# EAGLE board Sch (EAGLE 9.6.0)
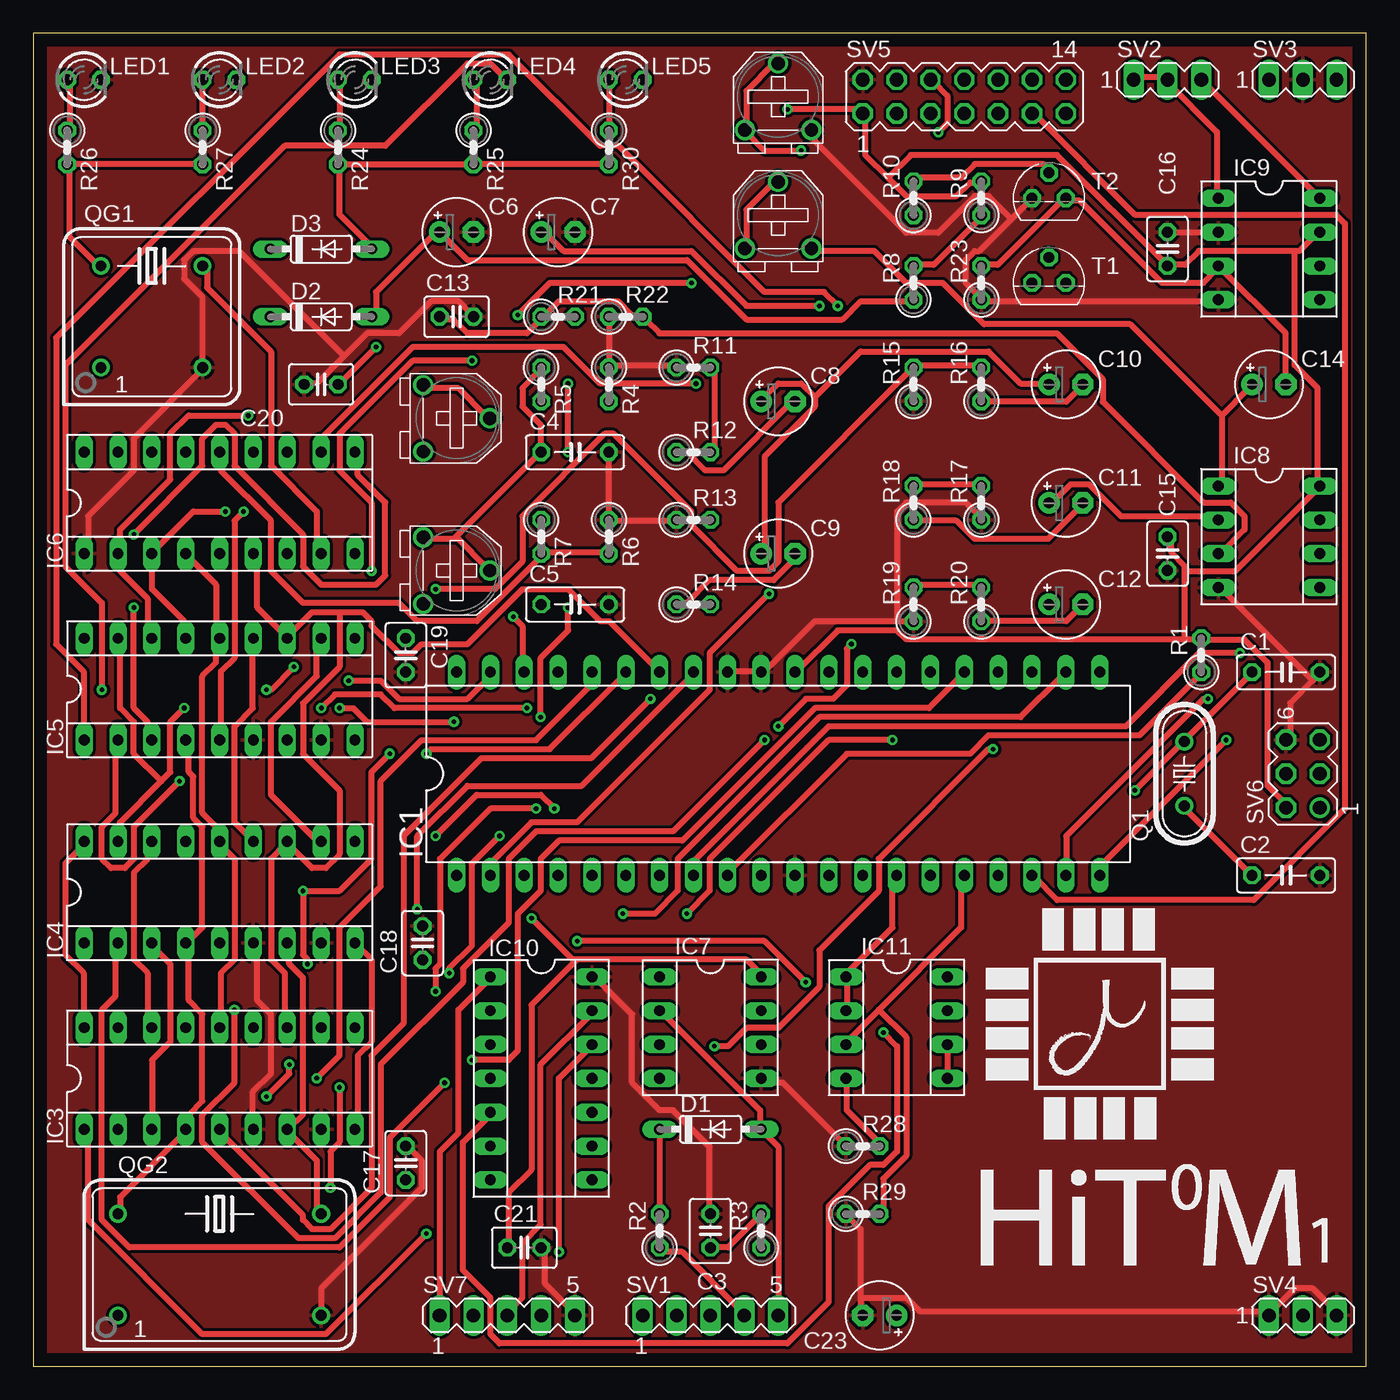
[diagram p0: board, top side]
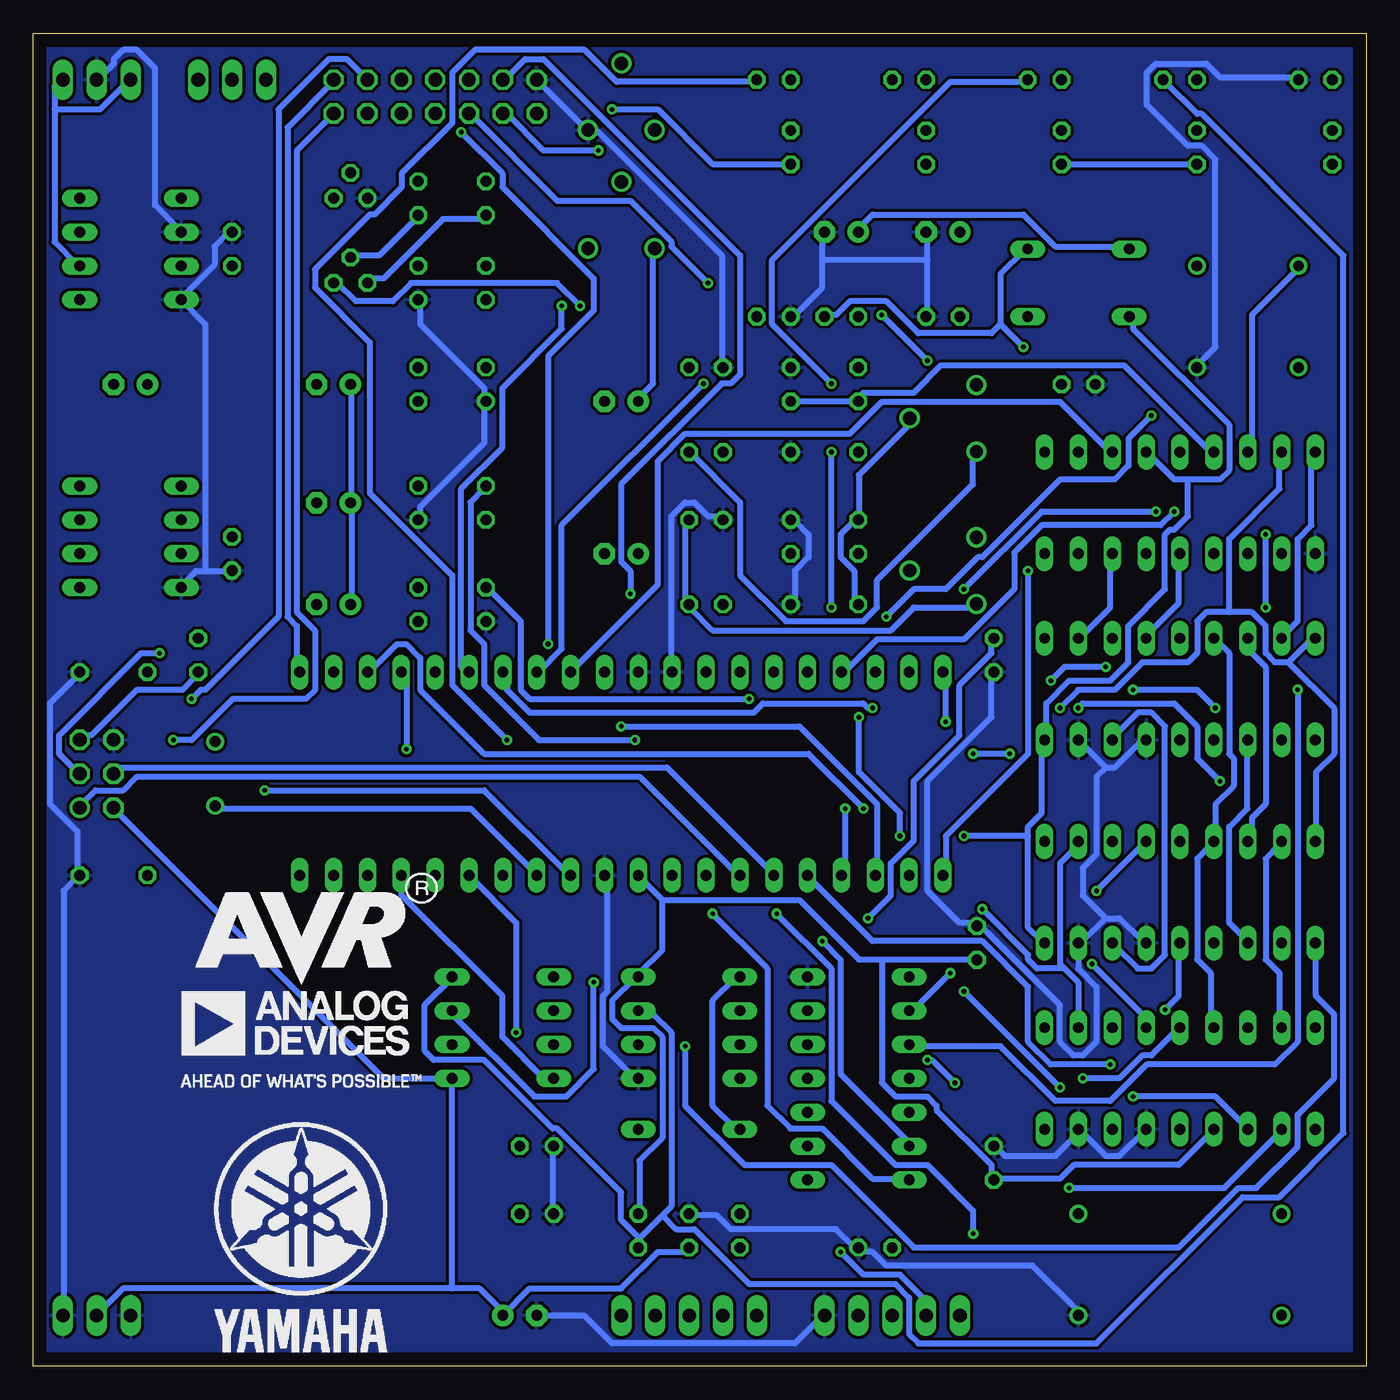
[diagram p1: board, bottom side, seen from below]

Size 100 x 100 mm. Coordinates in mm from the lower left corner, seen from the top.
Outline: 0,0 100,0 100,100 0,100 0,0
Copper layers (1*16): Top 0.035mm / dielectric 1.5mm / Bottom 0.035mm
Design rules "default": minimum track width 6mil, minimum drill 0.35mm, track to track 6mil, track to pad 6mil, pad to pad 6mil, via to via 6mil, smd to smd 6mil, copper to edge 40mil, drill to drill 6mil, minimum pad ring 10mil, minimum via ring 8mil, stop-mask expansion 4mil, vias tented up to drill 0mil, thermal gap 10mil
Net classes: 0 default: width 0.457 mm, clearance 0.229 mm

## Footprints (pad centres in the part's own frame; a part is rotated, then mirrored left to right if it is on the bottom)
C050-025X075 = drill 0.813 octagon: 1 -2.54,0; 2 2.54,0
C025-030X050 = drill 0.813 octagon: 1 -1.27,0; 2 1.27,0
E2,5-5 = drill 0.813 pad 1.6: + -1.27,0 | drill 0.813 pad 1.6 octagon: - 1.27,0
DO35-7 = drill 0.813 long: A 3.81,0; C -3.81,0
DIL40 = drill 0.813 long: 1 -24.13,-7.62; 2 -21.59,-7.62; 3 -19.05,-7.62; 4 -16.51,-7.62; 5 -13.97,-7.62; 6 -11.43,-7.62; 7 -8.89,-7.62; 8 -6.35,-7.62; 9 -3.81,-7.62; 10 -1.27,-7.62; 11 1.27,-7.62; 12 3.81,-7.62; 13 6.35,-7.62; 14 8.89,-7.62; 15 11.43,-7.62; 16 13.97,-7.62; 17 16.51,-7.62; 18 19.05,-7.62; 19 21.59,-7.62; 20 24.13,-7.62; 21 24.13,7.62; 22 21.59,7.62; 23 19.05,7.62; 24 16.51,7.62; 25 13.97,7.62; 26 11.43,7.62; 27 8.89,7.62; 28 6.35,7.62; 29 3.81,7.62; 30 1.27,7.62; 31 -1.27,7.62; 32 -3.81,7.62; 33 -6.35,7.62; 34 -8.89,7.62; 35 -11.43,7.62; 36 -13.97,7.62; 37 -16.51,7.62; 38 -19.05,7.62; 39 -21.59,7.62; 40 -24.13,7.62
SOCKET-18 = drill 0.813 long: 1 -10.16,-3.81; 2 -7.62,-3.81; 3 -5.08,-3.81; 4 -2.54,-3.81; 5 0,-3.81; 6 2.54,-3.81; 7 5.08,-3.81; 8 7.62,-3.81; 9 10.16,-3.81; 10 10.16,3.81; 11 7.62,3.81; 12 5.08,3.81; 13 2.54,3.81; 14 0,3.81; 15 -2.54,3.81; 16 -5.08,3.81; 17 -7.62,3.81; 18 -10.16,3.81
SOCKET-08 = drill 0.813 long: 1 -3.81,-3.81; 2 -1.27,-3.81; 3 1.27,-3.81; 4 3.81,-3.81; 5 3.81,3.81; 6 1.27,3.81; 7 -1.27,3.81; 8 -3.81,3.81
SOCKET-14 = drill 0.813 long: 1 -7.62,-3.81; 2 -5.08,-3.81; 3 -2.54,-3.81; 4 0,-3.81; 5 2.54,-3.81; 6 5.08,-3.81; 7 7.62,-3.81; 8 7.62,3.81; 9 5.08,3.81; 10 2.54,3.81; 11 0,3.81; 12 -2.54,3.81; 13 -5.08,3.81; 14 -7.62,3.81
LED3MM = drill 0.813 octagon: A -1.27,0; K 1.27,0
HC49/S = drill 0.813: 1 -2.413,0; 2 2.413,0
DIL08S = drill 0.813: 1 -3.81,-3.81; 4 3.81,-3.81; 5 3.81,3.81; 8 -3.81,3.81
DIL14S = drill 0.813: 1 -7.62,-3.81; 7 7.62,-3.81; 8 7.62,3.81; 14 -7.62,3.81
0207/2V = drill 0.813 octagon: 1 -1.27,0; 2 1.27,0
MA05-1 = drill 1.016 long: 1 -5.08,0; 2 -2.54,0; 3 0,0; 4 2.54,0; 5 5.08,0
MA03-1 = drill 1.016 long: 1 -2.54,0; 2 0,0; 3 2.54,0
MA07-2 = drill 1.016 octagon: 1 -7.62,-1.27; 2 -7.62,1.27; 3 -5.08,-1.27; 4 -5.08,1.27; 5 -2.54,-1.27; 6 -2.54,1.27; 7 0,-1.27; 8 0,1.27; 9 2.54,-1.27; 10 2.54,1.27; 11 5.08,-1.27; 12 5.08,1.27; 13 7.62,-1.27; 14 7.62,1.27
MA03-2 = drill 1.016: 1 -2.54,-1.27 | drill 1.016 octagon: 2 -2.54,1.27; 3 0,-1.27; 4 0,1.27; 5 2.54,-1.27; 6 2.54,1.27
TO92 = drill 0.813 octagon: 1 1.27,0; 2 0,1.905; 3 -1.27,0
TSR-065 = drill 1: 1 -2.5,-2.5; 2 0,2.5; 3 2.5,-2.5

## Placement (x,y rotation side)
C1  22pF  [C050-025X075]  93.98,52.07 0 top
C2  22pF  [C050-025X075]  93.98,36.83 0 top
C3  0.1u  [C025-030X050]  50.8,10.16 90 top
C4  0.015u  [C050-025X075]  40.64,68.58 0 top
C5  0.015u  [C050-025X075]  40.64,57.15 0 top
C6  10u  [E2,5-5]  31.75,85.09 0 top
C7  47u  [E2,5-5]  39.37,85.09 0 top
C8  10u  [E2,5-5]  55.88,72.39 0 top
C9  10u  [E2,5-5]  55.88,60.96 0 top
C10  10u  [E2,5-5]  77.47,73.66 0 top
C11  10u  [E2,5-5]  77.47,64.77 0 top
C12  10u  [E2,5-5]  77.47,57.15 0 top
C13  0.1u  [C025-030X050]  31.75,78.74 0 top
C14  100u  [E2,5-5]  92.71,73.66 0 top
C15  0.1u  [C025-030X050]  85.09,60.96 270 top
C16  0.1u  [C025-030X050]  85.09,83.82 90 top
C17  0.1u  [C025-030X050]  27.94,15.24 90 top
C18  0.1u  [C025-030X050]  29.21,31.75 90 top
C19  0.1u  [C025-030X050]  27.94,53.34 270 top
C20  0.1u  [C025-030X050]  21.59,73.66 180 top
C21  0.1u  [C025-030X050]  36.83,8.89 0 top
C23  470u  [E2,5-5]  63.5,3.81 180 top
D1  1N4148  [DO35-7]  50.8,17.78 0 top
D2  1N4148  [DO35-7]  21.59,78.74 0 top
D3  1N4148  [DO35-7]  21.59,83.82 0 top
IC1  MEGA32-P  [DIL40]  55.88,44.45 0 top
IC3  YMZ294  [SOCKET-18]  13.97,21.59 0 top
IC4  YMZ294  [SOCKET-18]  13.97,35.56 0 top
IC5  YMZ294  [SOCKET-18]  13.97,50.8 0 top
IC6  YM2413  [SOCKET-18]  13.97,64.77 0 top
IC7  TLP2630  [SOCKET-08]  50.8,25.4 270 top
IC8  NJM2114  [SOCKET-08]  92.71,62.23 270 top
IC9  SSM2019  [SOCKET-08]  92.71,83.82 270 top
IC10  MCP2221A  [SOCKET-14]  38.1,21.59 270 top
IC11  DIP-SW  [SOCKET-08]  64.77,25.4 270 top
LED1  POWER  [LED3MM]  3.81,96.52 0 top
LED2  MIDI_IN  [LED3MM]  13.97,96.52 0 top
LED3  RX  [LED3MM]  24.13,96.52 0 top
LED4  TX  [LED3MM]  34.29,96.52 0 top
LED5  USBEN  [LED3MM]  44.45,96.52 0 top
Q1  16MHz  [HC49/S]  86.36,44.45 90 top
QG1  3.579545MHz  [DIL08S]  8.89,78.74 0 top
QG2  8MHz  [DIL14S]  13.97,7.62 0 top
R1  10k  [0207/2V]  87.63,53.34 90 top
R2  220  [0207/2V]  46.99,10.16 90 top
R3  10k  [0207/2V]  54.61,10.16 90 top
R4  2.2k  [0207/2V]  43.18,73.66 270 top
R5  4.7k  [0207/2V]  38.1,73.66 270 top
R6  2.2k  [0207/2V]  43.18,62.23 270 top
R7  4.7k  [0207/2V]  38.1,62.23 270 top
R8  10k  [0207/2V]  66.04,81.28 90 top
R9  10k  [0207/2V]  71.12,87.63 90 top
R10  2.2k  [0207/2V]  66.04,87.63 90 top
R11  1.2k  [0207/2V]  49.53,74.93 0 top
R12  10k  [0207/2V]  49.53,68.58 0 top
R13  1.2k  [0207/2V]  49.53,63.5 0 top
R14  10k  [0207/2V]  49.53,57.15 0 top
R15  1.2k  [0207/2V]  66.04,73.66 90 top
R16  10k  [0207/2V]  71.12,73.66 90 top
R17  1.2k  [0207/2V]  71.12,64.77 90 top
R18  10k  [0207/2V]  66.04,64.77 90 top
R19  1.2k  [0207/2V]  66.04,57.15 90 top
R20  10k  [0207/2V]  71.12,57.15 90 top
R21  10k  [0207/2V]  39.37,78.74 0 top
R22  10k  [0207/2V]  44.45,78.74 0 top
R23  10k  [0207/2V]  71.12,81.28 90 top
R24  680  [0207/2V]  22.86,91.44 270 top
R25  680  [0207/2V]  33.02,91.44 270 top
R26  680  [0207/2V]  2.54,91.44 270 top
R27  680  [0207/2V]  12.7,91.44 270 top
R28  10k  [0207/2V]  62.23,16.51 0 top
R29  10k  [0207/2V]  62.23,11.43 0 top
R30  680  [0207/2V]  43.18,91.44 270 top
SV1  MIDI_IN  [MA05-1]  50.8,3.81 0 top
SV2  VR  [MA03-1]  85.09,96.52 0 top
SV3  OUT  [MA03-1]  95.25,96.52 0 top
SV4  POWER  [MA03-1]  95.25,3.81 0 top
SV5  LCD  [MA07-2]  69.85,95.25 0 top
SV6  ICSP  [MA03-2]  95.25,44.45 90 top
SV7  USB  [MA05-1]  35.56,3.81 0 top
T1  2SA1015  [TO92]  76.2,81.28 0 top
T2  2SD468  [TO92]  76.2,87.63 0 top
VR1  TSR-065  [TSR-065]  31.75,59.69 270 top
VR2  TSR-065  [TSR-065]  31.75,71.12 270 top
VR3  TSR-065  [TSR-065]  55.88,86.36 0 top
VR4  TSR-065  [TSR-065]  55.88,95.25 0 top

## Library data of the parts
C1-C21 C23 = rcl; SPICEPREFIX: C
D1-D3 = diode
IC1 = atmel; MPN: ATMEGA32-16PU; OC_FARNELL: 1661729; OC_NEWARK: 51P1794
IC3-IC11 = ic-package
LED1-LED5 = led
Q1 = crystal; OC_FARNELL: 1667008; OC_NEWARK: unknown
QG1 QG2 = crystal; OC_FARNELL: unknown; OC_NEWARK: unknown
R1-R30 = rcl; SPICEPREFIX: R
SV1-SV7 = con-lstb; OC_FARNELL: unknown; OC_NEWARK: unknown
T1 T2 = transistor
VR1-VR4 = akizuki

## Nets
A0: IC1.5 IC3.3 IC4.3 IC5.3 IC6.10
CONFIG1: IC1.16 IC11.3 R29.2
CONFIG2: IC1.17 IC11.4 R28.2
D+: IC10.13 SV7.3
D-: IC10.12 SV7.2
DATA0: IC1.40 IC3.18 IC4.18 IC5.18 IC6.17
DATA1: IC1.39 IC3.17 IC4.17 IC5.17 IC6.18
DATA2: IC1.38 IC3.16 IC4.16 IC5.16 IC6.2
DATA3: IC1.37 IC3.15 IC4.15 IC5.15 IC6.3
DATA4: IC1.36 IC3.14 IC4.14 IC5.14 IC6.4
DATA5: IC1.35 IC3.13 IC4.13 IC5.13 IC6.5
DATA6: IC1.34 IC3.12 IC4.12 IC5.12 IC6.6
DATA7: IC1.33 IC3.11 IC4.11 IC5.11 IC6.7
DB4: IC1.18 SV5.11
DB5: IC1.19 SV5.12
DB6: IC1.20 SV5.13
DB7: IC1.21 SV5.14
E: IC1.3 SV5.6
FM_CS: IC1.29 IC6.12
FM_MO: IC6.14 R6.2 R7.2
FM_RO: IC6.15 R4.2 R5.2
FM_WE: IC1.28 IC6.11
GND: C1.2 C2.2 C3.2 C4.2 C5.2 C6.- C7.- C13.2 C15.2 C16.2 C17.2 C18.2 C19.2 C20.2 C21.2 C23.- IC1.11 IC1.31 IC1.32 IC3.6 IC3.8 IC4.6 IC4.8 IC5.6 IC5.8 IC6.1 IC7.5 IC8.4 IC9.2 IC9.4 IC10.14 LED1.K QG1.4 QG2.7 R4.1 R6.1 R11.1 R13.1 R15.1 R17.1 R19.1 R22.1 R23.1 R28.1 R29.1 SV3.2 SV4.1 SV4.3 SV5.2 SV6.6 SV7.5 T2.3 VR4.3
GP0: IC10.2 LED3.K
GP1: IC10.3 LED4.K
GP2: IC10.7 LED5.K
IC: D2.C IC1.4 IC3.9 IC4.9 IC5.9 IC6.13
MIDI_IN: IC7.7 IC11.8 LED2.K R3.1
MISO: IC1.7 SV6.1
MOSI: IC1.6 SV6.4
N$1: R2.1 SV1.4
N$2: D1.A IC7.2 SV1.5
N$4: C2.1 IC1.13 Q1.1
N$5: D1.C IC7.1 R2.2
N$6: IC3.7 IC4.7 IC5.7 QG2.8
N$7: C6.+ D2.A R8.1
N$8: C4.1 R5.1 VR1.1 VR1.2
N$9: IC6.8 QG1.5
N$10: C8.+ C9.+ C10.+ C11.+ C12.+ IC8.2 VR3.1 VR3.2
N$11: C5.1 R7.1 VR2.1 VR2.2
N$12: LED3.A R24.1
N$13: R8.2 R9.1 T1.2
N$14: C7.+ D3.C T1.1
N$15: R10.1 T1.3
N$16: R10.2 T2.2
N$17: C14.- IC9.3 R23.2 T2.1
N$18: R11.2 R12.2 VR2.3
N$19: C8.- R12.1
N$20: R13.2 R14.2 VR1.3
N$21: C9.- R14.1
N$22: LED4.A R25.1
N$23: C10.- R16.1
N$24: LED5.A R30.1
N$25: C11.- R18.1
N$26: LED1.A R26.1
N$27: C12.- R20.1
N$28: C1.1 IC1.12 Q1.2
N$29: C14.+ IC8.1 VR3.3
N$30: IC9.1 SV2.1 SV2.2
N$31: IC9.8 SV2.3
N$32: LED2.A R27.1
N$33: IC9.6 SV3.1 SV3.3
N$38: SV5.8
N$39: SV5.10
N$44: SV5.7
N$45: SV5.9
NC: SV7.4
PSG1_CS: IC1.23 IC3.2
PSG1_OUT: IC3.5 R19.2 R20.2
PSG1_WR: IC1.22 IC3.1
PSG2_CS: IC1.25 IC4.2
PSG2_OUT: IC4.5 R17.2 R18.2
PSG2_WR: IC1.24 IC4.1
PSG3_CS: IC1.27 IC5.2
PSG3_OUT: IC5.5 R15.2 R16.2
PSG3_WR: IC1.26 IC5.1
R/W: IC1.1 SV5.5
RS: IC1.2 SV5.4
RST: IC1.9 R1.1 SV6.5
RX: IC1.14 IC11.1 IC11.2
SCK: IC1.8 SV6.3
TX: IC1.15 IC10.5
USB_RX: IC10.6 IC11.7
VBAS: IC10.1 SV7.1
VBIAS: C13.1 IC8.3 R21.1 R22.2
VCC: C3.1 C15.1 C16.1 C17.1 C18.1 C19.1 C20.1 C21.1 C23.+ D3.A IC1.10 IC1.30 IC3.4 IC4.4 IC5.4 IC6.16 IC7.8 IC8.8 IC9.7 IC11.5 IC11.6 QG1.8 QG2.14 R1.2 R3.2 R9.2 R21.2 R24.2 R25.2 R26.2 R27.2 R30.2 SV4.2 SV5.1 SV6.2
VO: SV5.3 VR4.1 VR4.2

## Tracks (layer width: path | path; a pad name or v marks a point on that pad's centre or on a via)
A0  (via drill 0.35)
  Top 0.457: IC3.3 8.91,17.83 8.91,22.97 10.29,24.35 10.29,30.18 8.91,31.55 IC4.3 | v19.2,22.63 19.2,21.95 v17.49,20.23 | v7.54,62.41 12.69,67.55 12.69,69.61 13.72,70.64 14.4,70.64 15.09,69.95 15.09,67.55 20.23,62.41 20.23,60.01 21.6,58.64 25.72,58.64 26.4,59.32 26.4,64.81 24.35,66.86 24.35,68.58 IC6.10 | v7.54,56.92 7.54,49.38 8.57,48.35 8.57,47.32 IC5.3
  Bottom 0.457: IC5.3 8.91,46.98 8.91,41.83 10.29,40.46 10.29,33.26 8.91,31.89 IC4.3 | v19.2,22.63 23.66,22.63 25.38,24.35 25.38,28.46 28.8,31.89 37.03,31.89 41.83,36.69 IC1.5 | v17.49,20.23 11.32,20.23 8.91,17.83 IC3.3 | v7.54,56.92 v7.54,62.41
CONFIG1
  Top 0.457: 63.44,26.75 69.61,32.92 69.61,36.69 IC1.16 | 63.44,26.75 61.04,24.35 IC11.3 | 63.44,26.75 65.49,24.69 65.49,15.77 63.78,14.06 63.78,11.66 R29.2
CONFIG2
  Top 0.457: IC11.4 61.04,21.26 61.04,19.2 63.44,16.8 R28.2
  Bottom 0.457: IC1.17 72.35,36.69 72.35,35.32 64.81,27.77 64.81,24.69 61.72,21.6 61.04,21.6 IC11.4
D+
  Top 0.457: IC10.13 41.83,26.4 38.06,22.63 38.06,10.63 36.69,9.26 36.69,5.14 35.66,4.12 SV7.3
D-  (via drill 0.35)
  Top 0.457: v39.43,8.57 39.43,21.6 41.83,24 IC10.12
  Bottom 0.457: v39.43,8.57 37.72,6.86 34.98,6.86 33.26,5.14 33.26,4.12 SV7.2
DATA0  (via drill 0.35)
  Top 0.457: IC3.18 3.77,25.72 3.77,29.49 2.4,30.86 2.4,37.72 3.77,39.09 IC4.18 | v31.55,48.35 25.03,48.35 24,49.38 v22.97,49.38
  Bottom 0.457: v31.55,48.35 31.55,51.78 IC1.40 | v22.97,49.38 21.6,50.75 18.86,50.75 16.8,52.81 13.37,52.81 12.69,53.49 12.69,55.89 12,56.58 10.29,56.58 | 10.29,56.58 8.57,56.58 7.54,55.55 7.54,53.49 6.86,52.81 5.83,52.81 | 5.83,52.81 4.12,54.52 IC5.18 | 10.29,56.58 10.29,62.06 6.51,65.84 6.51,68.58 IC6.17 | 5.83,52.81 2.4,49.38 2.4,45.95 3.77,44.58 3.77,39.43 IC4.18
DATA1  (via drill 0.35)
  Top 0.457: v23.66,51.44 26.06,51.44 27.43,50.06 32.58,50.06 34.29,51.78 IC1.39 | v19.55,52.46 17.83,50.75 v17.49,50.75 | v11.32,49.38 10.29,48.35 10.29,44.58 9.6,43.89 | 9.6,43.89 6.51,40.8 6.51,39.43 IC4.17 | 9.6,43.89 7.54,45.95 7.54,48.35 6.51,49.38 6.51,54.52 IC5.17
  Bottom 0.457: IC3.17 6.51,25.72 6.51,29.49 7.54,30.52 7.54,38.06 6.51,39.09 IC4.17 | v23.66,51.44 22.63,52.46 v19.55,52.46 | v17.49,50.75 12.69,50.75 v11.32,49.38 | IC6.18 4.12,68.58 4.12,63.09 5.14,62.06 5.14,55.89 6.17,54.86 IC5.17
DATA2  (via drill 0.35)
  Top 0.457: IC3.16 8.57,25.72 8.57,29.49 7.54,30.52 7.54,37.03 8.57,38.06 8.57,39.09 IC4.16 | IC5.16 8.57,54.86 8.57,57.61 6.51,59.66 6.51,60.69 IC6.2 6.51,61.04 6.51,62.75 10.29,66.52 10.29,69.95 11.66,71.32 v16.12,71.32 | v36.01,56.24 36.69,55.55 36.69,52.12 IC1.38
  Bottom 0.457: v36.01,56.24 33.95,58.29 31.55,58.29 29.15,60.69 28.8,60.69 22.97,66.52 18.86,66.52 17.83,67.55 17.83,69.61 v16.12,71.32 | IC4.16 8.57,39.43 8.57,41.15 7.54,42.18 7.54,52.46 8.57,53.49 8.57,54.52 IC5.16
DATA3  (via drill 0.35)
  Top 0.457: IC5.15 11.32,54.86 11.32,55.89 8.91,58.29 8.91,60.69 IC6.3 8.91,61.04 12,64.12 v14.4,64.12
  Bottom 0.457: IC3.15 11.66,25.72 11.66,29.49 12.69,30.52 12.69,38.06 11.66,39.09 IC4.15 11.32,39.43 11.32,42.18 9.94,43.55 9.94,45.61 10.29,45.95 10.29,53.49 11.32,54.52 IC5.15 | v14.4,64.12 15.43,63.09 24.35,63.09 26.4,61.04 26.4,58.29 30.18,54.52 36.69,54.52 39.09,52.12 IC1.37
DATA4  (via drill 0.35)
  Top 0.457: IC6.4 11.66,60.69 13.72,58.64 13.72,54.86 IC5.14 13.72,54.52 13.72,52.81 12.69,51.78 12.69,41.49 13.72,40.46 13.72,39.43 IC4.14 14.06,39.09 15.09,38.06 15.09,30.52 14.06,29.49 14.06,25.72 IC3.14 | v21.26,21.6 22.97,23.32 22.97,32.92 26.06,36.01 26.06,43.89 29.15,46.98 37.72,46.98 41.83,51.09 41.83,51.78 IC1.36
  Bottom 0.457: v21.26,21.6 18.52,21.6 16.8,23.32 16.12,23.32 14.06,25.38 IC3.14
DATA5  (via drill 0.35)
  Top 0.457: v20.57,30.18 20.57,30.52 20.23,30.86 v20.23,35.66 22.97,35.66 25.38,38.06 25.38,44.58 v26.75,45.95 | v29.49,45.95 29.83,46.29 38.75,46.29 44.23,51.78 IC1.35 | IC5.13 16.46,54.52 16.46,49.38 15.09,48.01 15.09,40.8 16.46,39.43 IC4.13
  Bottom 0.457: IC6.5 14.06,60.69 14.06,57.26 16.46,54.86 IC5.13 | v20.57,30.18 16.8,26.4 16.8,25.72 IC3.13 | v20.23,35.66 16.8,39.09 IC4.13 | v26.75,45.95 v29.49,45.95
DATA6
  Top 0.457: IC3.12 18.86,25.72 18.86,29.49 17.83,30.52 17.83,38.06 18.86,39.09 IC4.12 19.2,39.09 20.92,37.38 21.95,37.38 22.97,38.41 22.97,43.2 20.23,45.95 20.23,49.72 22.97,52.46 22.97,56.58 | IC6.6 16.8,60.69 16.8,56.92 18.86,54.86 IC5.12 19.2,54.86 20.92,56.58 22.97,56.58 | 22.97,56.58 24.69,56.58 25.38,55.89 25.38,55.55 27.43,53.49 28.46,53.49 29.15,54.18 32.58,54.18 36.69,58.29 40.12,58.29 42.52,55.89 43.2,55.89 46.98,52.12 IC1.34
DATA7  (via drill 0.35)
  Top 0.457: v28.8,34.29 28.8,39.78 32.58,43.55 41.15,43.55 49.38,51.78 IC1.33 | IC5.11 21.26,54.52 21.26,51.78 17.83,48.35 17.83,42.86 21.26,39.43 IC4.11
  Bottom 0.457: IC6.7 19.2,60.69 19.2,56.92 21.26,54.86 IC5.11 | 22.63,29.83 22.97,30.18 22.97,37.72 21.6,39.09 IC4.11 | 22.63,29.83 21.6,28.8 21.6,25.72 IC3.11 | v28.8,34.29 25.38,30.86 25.38,30.52 24.69,29.83 22.63,29.83
DB4
  Top 0.457: IC1.18 75.09,36.69 76.81,34.98 91.55,34.98 98.41,41.83 98.41,85.72 97.73,86.41 82.64,86.41 75.09,93.95 SV5.11
DB5  (via drill 0.35)
  Top 0.457: v88.12,50.06 87.78,50.06 77.5,39.78 77.5,37.03 IC1.19
  Bottom 0.457: v88.12,50.06 87.44,50.75 87.1,50.75 81.61,56.24 81.61,94.3 77.84,98.07 76.47,98.07 75.09,96.7 SV5.12
DB6  (via drill 0.35)
  Top 0.457: v89.5,46.98 80.24,37.72 80.24,37.03 IC1.20
  Bottom 0.457: v89.5,46.98 88.12,46.98 85.04,50.06 79.55,50.06 78.87,50.75 78.87,55.21 80.24,56.58 80.24,91.21 SV5.13
DB7
  Bottom 0.457: IC1.21 80.24,52.12 80.24,55.55 80.92,56.24 80.92,92.93 77.5,96.36 SV5.14
E  (via drill 0.35)
  Top 0.457: v55.89,48.01 57.95,50.06 60.01,50.06 61.04,51.09 61.04,53.84 v61.38,54.18 | v67.89,92.58 68.58,93.27 68.58,95.33 67.55,96.36 SV5.6
  Bottom 0.457: v55.89,48.01 42.52,48.01 36.69,42.18 36.69,37.03 IC1.3 | v61.38,54.18 61.38,75.78 57.95,79.21 57.95,81.61 64.81,88.47 64.81,89.5 v67.89,92.58
FM_CS
  Bottom 0.457: IC6.12 19.2,68.58 22.97,72.35 36.35,72.35 38.75,69.95 51.09,69.95 53.15,67.89 53.15,58.64 59.66,52.12 IC1.29
FM_MO
  Top 0.457: R6.2 42.86,61.04 38.41,61.04 R7.2 38.06,60.69 33.26,55.89 28.8,55.89 27.43,57.26 20.23,57.26 17.83,59.66 17.83,63.44 14.06,67.21 14.06,68.58 IC6.14
FM_RO
  Bottom 0.457: IC6.15 11.66,68.58 18.17,75.09 31.89,75.09 33.95,73.04 37.72,73.04 38.06,72.69 R5.2 38.41,72.35 42.86,72.35 R4.2
FM_WE  (via drill 0.35)
  Top 0.457: v49.72,73.72 42.52,73.72 39.78,76.47 28.46,76.47 21.6,69.61 21.6,68.58 IC6.11
  Bottom 0.457: v49.72,73.72 60.35,63.09 60.35,53.84 62.06,52.12 IC1.28
GND
  Top 0.457: SV4.3 97.73,4.12 96.01,5.83 94.64,5.83 92.93,4.12 SV4.1 92.58,4.12 66.52,4.12 65.49,5.14 62.06,5.14 | IC7.5 54.86,21.26 56.24,21.26 60.69,16.8 R28.1 | 62.06,5.14 62.06,10.29 61.04,11.32 R29.1 | 62.06,5.14 62.06,4.12 C23.- | C21.2 38.41,8.57 38.41,6.17 40.46,4.12 SV7.5 | IC10.14 42.18,29.15 44.92,26.4 44.92,21.26 46.98,19.2 48.01,19.2 50.75,16.46 50.75,11.66 C3.2 | QG2.7 21.6,4.12 21.6,5.83 29.15,13.37 29.15,15.43 28.12,16.46 C17.2 | IC4.6 16.8,31.55 16.8,27.43 17.83,26.4 17.83,21.95 16.46,20.57 16.46,17.83 IC3.6 | IC6.1 4.12,61.04 4.12,63.78 7.54,67.21 7.54,69.61 12.69,74.75 QG1.4 12.69,75.09 12.69,80.24 11.32,81.61 11.32,82.98 12,83.67 15.43,83.67 23.32,75.78 | 43.2,75.09 43.2,78.52 R22.1 | 43.2,75.09 48.01,75.09 R11.1 | 43.2,75.09 R4.1 | 23.32,75.78 25.03,77.5 27.43,77.5 29.83,79.9 31.89,79.9 32.92,78.87 C13.2 | 23.32,75.78 21.26,73.72 20.57,73.72 C20.2 | R13.1 48.01,63.44 43.2,63.44 R6.1 43.2,63.78 43.2,68.58 C4.2 | IC1.32 52.12,52.12 54.52,52.12 IC1.31 54.86,52.12 58.64,55.89 64.81,55.89 | 64.81,55.89 65.84,55.89 R19.1 | 96.01,51.44 96.36,51.78 C1.2 | 96.01,51.44 94.3,49.72 94.3,47.32 SV6.6 | 96.01,51.44 89.15,58.29 IC8.4 | C16.2 85.38,85.04 88.81,85.04 IC9.2 | 73.38,86.07 70.98,83.67 70.64,83.67 69.95,82.98 69.95,81.27 70.98,80.24 R23.1 71.32,79.9 88.81,79.9 IC9.4 | 73.38,86.07 74.75,87.44 T2.3 | 73.38,86.07 71.67,87.78 70.64,87.78 67.89,85.04 65.49,85.04 58.64,91.9 58.64,92.58 VR4.3 | 64.81,55.89 64.81,64.12 65.49,64.81 69.95,64.81 70.98,63.78 R17.1
  Bottom 0.457: R29.1 61.04,11.66 61.04,16.46 R28.1 | IC1.11 56.92,36.69 56.92,28.12 57.26,27.77 57.26,24 54.86,21.6 IC7.5 | C3.2 50.75,11.32 48.69,11.32 47.66,10.29 39.78,10.29 38.41,8.91 C21.2 38.06,8.57 37.03,8.57 36.01,7.54 25.03,7.54 21.6,4.12 QG2.7 | C19.2 28.12,51.78 28.12,48.69 32.92,43.89 32.92,35.66 30.52,33.26 29.49,33.26 C18.2 29.15,32.92 28.8,32.92 22.97,27.09 22.97,24.35 21.95,23.32 21.26,23.32 20.23,24.35 20.23,28.46 21.6,29.83 21.6,31.55 IC4.8 21.26,31.89 19.55,33.6 | 19.55,33.6 18.52,33.6 16.8,31.89 IC4.6 | 19.55,44.92 18.86,44.92 16.8,46.98 IC5.6 | 19.55,44.92 21.6,46.98 IC5.8 | 19.55,33.6 21.26,35.32 21.26,37.38 20.23,38.41 20.23,44.23 19.55,44.92 | IC3.6 18.52,15.77 19.55,15.77 21.26,17.49 IC3.8 21.6,17.49 23.32,15.77 27.09,15.77 27.77,16.46 C17.2 | C23.- 62.06,3.77 58.64,3.77 56.58,1.71 42.86,1.71 40.8,3.77 SV7.5 | LED1.K 5.14,96.7 10.97,96.7 12,97.73 15.77,97.73 16.46,97.04 16.46,94.64 13.37,91.55 12.34,91.55 11.32,90.53 11.32,76.47 12.69,75.09 QG1.4 | 40.8,82.98 40.8,80.92 42.86,78.87 R22.1 | 40.8,82.98 40.8,85.04 C7.- | 32.92,82.98 32.92,78.87 C13.2 | 32.92,82.98 32.92,85.04 C6.- | 32.92,82.98 40.8,82.98 | C5.2 42.86,57.26 42.86,59.66 41.83,60.69 41.83,62.41 42.86,63.44 R6.1 | R13.1 48.35,63.78 49.38,63.78 50.41,64.81 51.09,64.81 52.12,63.78 52.12,52.12 IC1.32 | 87.1,59.66 87.78,59.66 88.81,58.64 IC8.4 | 87.1,59.66 85.38,59.66 C15.2 | C1.2 96.7,51.78 98.75,49.72 98.75,42.18 96.7,40.12 96.7,37.03 C2.2 96.7,36.69 97.73,35.66 97.73,4.12 SV4.3 | C16.2 85.38,85.04 86.41,84.01 86.41,82.64 88.81,80.24 IC9.4 88.81,79.9 87.1,78.18 87.1,59.66
  Bottom 0.457: SV3.2 94.98,96.7 93.95,97.73 93.95,98.07 93.27,98.75 92.24,98.75 90.87,97.38 90.87,87.1 89.15,85.38 IC9.2 | SV5.2 58.64,92.93 VR4.3 58.29,92.58 57.61,92.58 48.35,83.33 48.35,75.09 R11.1 | R23.1 70.98,79.9 70.98,78.18 66.18,73.38 66.18,72.69 R15.1 66.18,72.35 66.18,69.27 70.98,64.47 70.98,63.78 R17.1
  pour Top: 0,0 100.33,0 100.33,100.33 0,100.33
  pour Bottom: 0,0 100.33,0 100.33,100.33 0,100.33
GP0  (via drill 0.35)
  Top 0.457: v40.12,68.58 v40.12,73.72 | v40.12,56.92 40.12,55.21 38.06,53.15 v38.06,48.69 | v34.98,39.78 32.92,37.72 32.92,31.55 31.2,29.83 v31.2,29.49
  Bottom 0.457: v40.12,73.72 44.58,78.18 44.58,82.98 31.2,96.36 25.72,96.36 LED3.K | v40.12,56.92 v40.12,68.58 | v38.06,48.69 38.06,44.58 34.98,41.49 v34.98,39.78 | v31.2,29.49 34.29,26.4 IC10.2
GP1  (via drill 0.35)
  Top 0.457: v5.14,50.75 5.14,57.26 2.4,60.01 2.4,75.09 18.86,91.55 26.4,91.55 32.58,97.73 34.29,97.73 35.32,96.7 LED4.K
  Bottom 0.457: v5.14,50.75 5.14,24.35 6.86,22.63 16.46,22.63 19.2,19.89 23.32,19.89 27.43,24 34.29,24 IC10.3
GP2  (via drill 0.35)
  Top 0.457: v49.03,33.95 50.75,35.66 50.75,38.06 59.66,46.98 v64.47,46.98
  Bottom 0.457: v49.03,33.95 44.92,29.83 44.92,19.55 43.2,17.83 40.8,17.83 37.03,14.06 34.29,14.06 IC10.7 | v64.47,46.98 68.58,51.09 68.58,59.32 74.75,65.49 74.75,76.81 78.87,80.92 78.87,82.3 74.75,86.41 74.41,86.41 72.35,88.47 72.35,89.5 68.58,93.27 68.58,97.04 66.86,98.75 58.64,98.75 56.24,96.36 45.95,96.36 LED5.K
IC  (via drill 0.35)
  Top 0.457: IC3.9 24.35,17.83 24.35,23.32 25.38,24.35 25.38,30.52 24.35,31.55 IC4.9 | v39.09,41.83 38.06,42.86 33.26,42.86 v30.18,39.78
  Bottom 0.457: 13.37,66.52 10.97,66.52 10.29,67.21 10.29,70.64 17.49,77.84 17.49,78.52 D2.C | 13.37,66.52 14.4,66.52 16.46,68.58 IC6.13 | 25.38,39.78 25.38,32.92 24.35,31.89 IC4.9 | 25.38,39.78 25.38,40.46 24.35,41.49 24.35,46.98 IC5.9 24,47.32 24,49.72 22.29,51.44 19.2,51.44 17.83,52.81 17.83,55.55 15.09,58.29 15.09,62.41 14.74,62.75 14.4,62.75 13.37,63.78 13.37,66.52 | v39.09,41.83 39.09,37.03 IC1.4 | 25.38,39.78 v30.18,39.78
MIDI_IN
  Bottom 0.457: 54.52,9.6 54.52,8.91 R3.1 | 52.81,11.32 52.12,12 52.12,25.03 53.49,26.4 54.52,26.4 IC7.7 | 52.81,11.32 54.52,9.6 | 54.52,9.6 55.89,10.97 55.89,13.03 60.69,17.83 61.04,17.83 66.18,22.97 69.95,22.97 70.64,23.66 70.64,27.09 68.58,29.15 IC11.8 | 52.81,11.32 51.78,10.29 50.41,10.29 46.29,6.17 35.32,6.17 34.29,5.14 34.29,2.4 33.6,1.71 20.23,1.71 9.26,12.69 6.51,12.69 1.71,17.49 1.71,83.33 12.34,93.95 12.69,93.95 15.09,96.36 LED2.K
MISO
  Bottom 0.457: IC1.7 47.32,37.03 54.52,44.23 92.24,44.23 93.27,43.2 95.33,43.2 96.36,42.18 SV6.1
MOSI
  Bottom 0.457: IC1.6 44.58,37.03 52.46,44.92 93.61,44.92 93.95,44.58 SV6.4
N$1
  Top 0.457: R2.1 47.32,8.57 48.69,8.57 53.15,4.12 SV1.4
N$2
  Top 0.457: IC7.2 47.32,26.4 54.52,19.2 54.52,17.83 D1.A 54.86,17.49 55.89,16.46 55.89,4.12 SV1.5
N$4
  Top 0.457: C2.1 91.21,37.03 86.41,41.83 Q1.1
  Bottom 0.457: IC1.13 62.41,37.03 67.21,41.83 86.07,41.83 Q1.1
N$5
  Top 0.457: R2.2 46.98,11.66 46.98,17.49 D1.C
  Bottom 0.457: IC7.1 47.32,29.15 49.03,27.43 49.03,19.55 47.32,17.83 D1.C
N$6
  Top 0.457: QG2.8 21.26,11.66 21.26,15.43 19.2,17.49 IC3.7 19.2,17.83 20.23,18.86 20.23,29.15 19.2,30.18 19.2,31.55 IC4.7
  Bottom 0.457: IC5.7 18.86,47.32 17.14,49.03 16.12,49.03 15.09,48.01 15.09,30.86 16.12,29.83 17.14,29.83 18.86,31.55 IC4.7
N$7
  Top 0.457: D2.A 25.72,78.87 25.72,80.58 30.18,85.04 C6.+ 30.52,85.04 32.58,82.98 49.03,82.98 53.49,78.52 60.69,78.52 62.06,79.9 65.84,79.9 R8.1
N$8
  Top 0.457: 38.06,68.58 38.06,70.64 36.69,72.01 36.69,73.38 38.06,74.75 R5.1 | 31.55,62.06 31.89,62.06 33.95,60.01 VR1.2 | 31.55,62.06 29.49,62.06 VR1.1 | 31.55,62.06 38.06,68.58 | 38.06,68.58 C4.1
N$9
  Top 0.457: IC6.8 21.26,61.04 21.26,64.12 17.83,67.55 17.83,76.12 13.03,80.92 13.03,82.3 QG1.5
N$10
  Top 0.457: IC8.2 88.81,63.78 81.61,63.78 79.21,66.18 77.84,66.18 76.47,64.81 C11.+ | VR3.1 53.49,84.01 53.49,86.75 55.55,88.81 VR3.2 | 58.64,72.69 58.64,72.01 54.86,68.24 54.86,61.04 C9.+ | 58.64,72.69 57.61,73.72 55.89,73.72 54.86,72.69 C8.+ | 58.64,72.69 62.06,76.12 71.67,76.12 74.07,73.72 76.12,73.72 C10.+
  Bottom 0.457: C12.+ 76.12,57.26 76.12,64.47 C11.+ 76.12,64.81 76.12,73.38 C10.+ | VR3.1 53.49,83.67 53.49,73.72 54.52,72.69 C8.+
N$11
  Top 0.457: VR2.1 29.49,73.38 31.89,73.38 33.95,71.32 VR2.2
  Bottom 0.457: C5.1 38.41,57.26 38.41,59.66 39.43,60.69 39.43,62.41 38.41,63.44 R7.1 38.06,63.78 38.06,66.86 33.95,70.98 VR2.2
N$12
  Top 0.457: R24.1 22.97,92.93 22.97,96.36 LED3.A
N$13
  Top 0.457: R8.2 66.18,82.64 67.55,82.64 70.98,86.07 R9.1
  Bottom 0.457: T1.2 76.12,83.33 74.07,83.33 71.32,86.07 R9.1
N$14  (via drill 0.35)
  Top 0.457: v58.98,79.55 53.49,79.55 49.38,83.67 39.78,83.67 38.41,85.04 C7.+
  Bottom 0.457: D3.C 17.83,84.01 23.32,84.01 25.72,86.41 37.03,86.41 38.06,85.38 C7.+ | v58.98,79.55 60.69,81.27 71.67,81.27 73.04,79.9 75.78,79.9 77.15,81.27 T1.1
N$15
  Bottom 0.457: T1.3 74.75,81.61 73.72,81.61 69.27,86.07 66.18,86.07 R10.1
N$16
  Top 0.457: R10.2 66.18,89.15 69.61,89.15 70.64,90.18 75.78,90.18 76.12,89.84 T2.2
N$17
  Top 0.457: R23.2 71.32,82.64 72.35,82.64 77.15,87.44 T2.1 77.5,87.44 78.52,87.44 84.7,81.27 87.78,81.27 88.81,82.3 IC9.3 93.95,77.5 93.95,73.72 C14.-
N$18
  Top 0.457: R12.2 51.09,68.58 51.09,74.75 R11.2
  Bottom 0.457: VR2.3 29.49,68.58 29.49,66.18 36.69,58.98 36.69,56.92 37.72,55.89 43.55,55.89 46.98,59.32 46.98,64.81 50.75,68.58 R12.2
N$19
  Top 0.457: R12.1 49.03,68.58 50.41,67.21 51.78,67.21 56.92,72.35 C8.-
N$20
  Bottom 0.457: R13.2 51.09,63.44 51.09,57.26 R14.2 50.75,56.92 49.03,55.21 35.66,55.21 33.95,56.92 29.49,56.92 VR1.3
N$21
  Top 0.457: R14.1 48.35,57.26 49.03,57.26 50.75,58.98 55.55,58.98 57.26,60.69 C9.-
N$22
  Top 0.457: R25.1 33.26,92.93 33.26,96.36 LED4.A
N$23
  Top 0.457: R16.1 71.32,72.35 77.5,72.35 78.52,73.38 C10.-
N$24
  Top 0.457: R30.1 43.2,92.93 43.2,96.36 LED5.A
N$25
  Top 0.457: R18.1 66.18,63.44 69.27,63.44 70.64,62.06 76.12,62.06 78.52,64.47 C11.-
N$26
  Top 0.457: R26.1 2.74,92.93 2.74,96.36 LED1.A
N$27
  Top 0.457: R20.1 71.32,55.89 77.5,55.89 78.52,56.92 C12.-
N$28  (via drill 0.35)
  Top 0.457: v82.64,43.2 86.07,46.63 Q1.2 86.41,46.98 91.21,51.78 C1.1
  Bottom 0.457: v82.64,43.2 66.18,43.2 60.01,37.03 IC1.12
N$29
  Top 0.457: 89.15,71.32 89.15,66.18 IC8.1 | 89.15,71.32 91.21,73.38 C14.+ | 89.15,71.32 82.3,78.18 71.32,78.18 68.24,81.27 65.49,81.27 63.09,83.67 58.64,83.67 VR3.3
N$30
  Top 0.457: IC9.1 88.81,87.78 88.81,92.58 85.04,96.36 SV2.2 85.04,96.7 82.64,96.7 SV2.1
N$31
  Top 0.457: IC9.8 96.36,87.78 87.78,96.36 SV2.3
N$32
  Top 0.457: R27.1 12.69,92.93 12.69,96.36 LED2.A
N$33
  Bottom 0.457: 98.41,94.3 98.41,96.01 98.07,96.36 SV3.3 | 98.41,94.3 98.41,84.35 96.7,82.64 IC9.6 | 98.41,94.3 94.98,94.3 92.93,96.36 SV3.1
PSG1_CS  (via drill 0.35)
  Top 0.457: v22.29,13.37 22.29,16.12 22.97,16.8 v22.97,20.92 | v30.18,28.12 30.18,29.83 30.52,30.18 30.52,38.06 34.29,41.83 v37.72,41.83
  Bottom 0.457: v22.29,13.37 10.63,13.37 6.51,17.49 IC3.2 | v30.18,28.12 v22.97,20.92 | v37.72,41.83 41.83,45.95 66.18,45.95 70.98,50.75 70.98,53.15 72.01,54.18 72.69,54.18 74.75,52.12 IC1.23
PSG1_OUT  (via drill 0.35)
  Top 0.457: v46.29,50.06 41.83,45.61 33.6,45.61 27.77,39.78 27.77,25.72 25.38,23.32 25.38,13.37 22.29,10.29 20.92,10.29 20.23,10.97 20.23,11.32 14.06,17.49 IC3.5 | R20.2 70.98,58.64 66.18,58.64 R19.2
  Bottom 0.457: v46.29,50.06 62.75,50.06 63.44,50.75 63.44,55.89 65.84,58.29 R19.2
PSG1_WR  (via drill 0.35)
  Top 0.457: v29.49,9.94 21.95,2.4 12.69,2.4 4.12,10.97 4.12,17.49 IC3.1 | v44.23,33.95 46.63,33.95 48.35,35.66 48.35,38.06 58.98,48.69 74.07,48.69 77.15,51.78 IC1.22
  Bottom 0.457: v29.49,9.94 29.49,11.66 32.92,15.09 35.32,15.09 40.12,19.89 40.12,29.83 v44.23,33.95
PSG2_CS  (via drill 0.35)
  Top 0.457: v30.86,21.26 26.75,17.14 26.75,12.69 22.97,8.91 7.2,8.91 5.14,10.97 5.14,26.75 6.17,27.77 6.17,31.55 IC4.2 | v32.92,22.97 35.66,22.97 36.35,23.66 36.35,33.95 38.06,35.66 38.06,38.06 39.43,39.43 48.69,39.43 58.64,49.38 67.21,49.38 69.61,51.78 IC1.25
  Bottom 0.457: v30.86,21.26 32.58,22.97 v32.92,22.97
PSG2_OUT  (via drill 0.35)
  Top 0.457: v15.09,26.75 15.09,21.26 12.69,18.86 12.69,16.8 19.89,9.6 22.63,9.6 26.06,13.03 26.06,22.63 32.23,28.8 32.23,29.83 35.66,33.26 35.66,38.06 37.72,40.12 48.01,40.12 v54.86,46.98 | R17.2 70.98,66.18 66.18,66.18 R18.2
  Bottom 0.457: v15.09,26.75 14.06,27.77 14.06,31.55 IC4.5 | v54.86,46.98 62.06,46.98 66.18,51.09 66.18,54.18 67.21,55.21 67.21,64.81 66.18,65.84 R18.2
PSG2_WR  (via drill 0.35)
  Top 0.457: v51.09,24 52.12,24 53.49,25.38 55.89,25.38 58.98,28.46 58.98,31.2 63.44,35.66 63.44,38.06 71.67,46.29 v72.01,46.29
  Bottom 0.457: v51.09,24 51.09,19.55 46.63,15.09 40.12,15.09 33.95,8.91 14.06,8.91 9.6,13.37 8.23,13.37 5.14,16.46 5.14,18.86 2.4,21.6 2.4,26.4 3.77,27.77 3.77,31.55 IC4.1 | v72.01,46.29 72.01,51.44 72.35,51.78 IC1.24
PSG3_CS  (via drill 0.35)
  Top 0.457: v10.97,43.89 7.54,40.46 7.54,38.06 6.86,37.38 5.83,37.38 5.14,38.06 5.14,40.46 6.17,41.49 6.17,46.98 IC5.2 | v21.6,49.38 22.63,50.41 26.06,50.41 27.09,49.38 v37.03,49.38
  Bottom 0.457: v10.97,43.89 12.69,45.61 12.69,48.01 14.4,49.72 21.26,49.72 v21.6,49.38 | v37.03,49.38 37.38,49.38 37.72,49.72 45.26,49.72 45.95,49.03 62.75,49.03 64.47,50.75 64.47,51.78 IC1.27
PSG3_OUT  (via drill 0.35)
  Top 0.457: v15.77,64.12 15.09,63.44 15.09,53.15 14.06,52.12 14.06,47.32 IC5.5 | v30.18,58.29 34.63,58.29 36.69,60.35 36.69,63.78 42.86,69.95 43.55,69.95 49.38,64.12 49.38,63.09 52.81,59.66 55.21,59.66 55.89,60.35 55.89,64.81 65.84,74.75 R15.2 66.18,75.09 70.98,75.09 R16.2
  Bottom 0.457: v15.77,64.12 24.35,64.12 v30.18,58.29
PSG3_WR  (via drill 0.35)
  Top 0.457: v60.35,79.55 59.32,80.58 54.86,80.58 43.89,91.55 42.52,91.55 35.66,98.41 22.97,98.41 1.71,77.15 1.71,54.18 3.77,52.12 3.77,47.32 IC5.1
  Bottom 0.457: v60.35,79.55 60.35,77.84 64.81,73.38 64.81,68.92 67.89,65.84 67.89,52.46 67.55,52.12 IC1.26
R/W  (via drill 0.35)
  Top 0.457: v25.38,59.66 25.38,64.81 22.97,67.21 22.97,69.95 28.46,75.44 v32.92,75.44 | v36.35,78.87 38.75,81.27 v49.38,81.27
  Bottom 0.457: v25.38,59.66 25.38,45.95 31.55,39.78 31.55,37.03 IC1.1 | v36.35,78.87 v32.92,75.44 | v49.38,81.27 52.12,84.01 52.12,84.35 55.21,87.44 60.69,87.44 67.21,93.95 SV5.5
RS  (via drill 0.35)
  Top 0.457: IC1.2 34.29,37.72 37.38,40.8 40.8,40.8 50.75,50.75 50.75,53.49 v55.21,57.95
  Bottom 0.457: v55.21,57.95 55.21,59.66 55.89,60.35 55.89,66.18 48.35,73.72 47.66,73.72 46.98,74.41 46.98,83.33 61.72,98.07 63.09,98.07 64.47,96.7 SV5.4
RST
  Top 0.457: IC1.9 52.12,37.03 61.04,45.95 70.29,45.95 71.67,47.32 82.98,47.32 87.44,51.78 R1.1
  Bottom 0.457: SV6.5 96.36,47.32 95.67,47.32 92.24,50.75 88.81,50.75 87.78,51.78 R1.1
RX
  Top 0.457: IC11.2 61.04,26.75 61.04,29.15 IC11.1 61.04,29.49 64.47,32.92 64.47,36.69 IC1.14
SCK  (via drill 0.35)
  Top 0.457: v90.53,53.49 87.44,53.49 81.95,48.01 59.66,48.01 49.72,38.06 49.72,37.03 IC1.8
  Bottom 0.457: v90.53,53.49 91.9,53.49 98.07,47.32 98.07,45.95 96.7,44.58 SV6.3
TX  (via drill 0.35)
  Top 0.457: v63.78,25.03 64.81,24 64.81,16.12 63.78,15.09 62.75,15.09 59.66,12 59.66,4.8 56.58,1.71 34.98,1.71 34.29,2.4 34.29,5.14 32.23,7.2 32.23,16.8 34.29,18.86 IC10.5
  Bottom 0.457: v63.78,25.03 63.78,33.26 67.21,36.69 IC1.15
USB_RX  (via drill 0.35)
  Top 0.457: v40.8,31.89 54.86,31.89 v57.95,28.8
  Bottom 0.457: v40.8,31.89 39.43,30.52 39.43,21.95 34.29,16.8 IC10.6 | v57.95,28.8 57.95,22.29 60.01,20.23 62.41,20.23 68.58,26.4 IC11.7
VBAS
  Top 0.457: IC10.1 34.29,29.15 31.89,26.75 31.89,17.49 30.52,16.12 30.52,4.12 SV7.1
VBIAS
  Top 0.457: C13.1 30.52,78.52 31.55,78.52 32.58,77.5 37.03,77.5 38.06,78.52 R21.1 38.41,78.87 39.43,79.9 43.89,79.9 44.92,78.87 45.61,78.87 R22.2 45.95,78.52 46.98,77.5 76.81,77.5 80.24,74.07 80.24,72.35 87.78,64.81 89.84,64.81 90.87,63.78 90.87,62.75 89.15,61.04 IC8.3
VCC  (via drill 0.35)
  Top 0.457: C3.1 51.09,8.91 52.12,8.91 54.52,11.32 R3.2 | IC11.6 IC11.5 | QG2.14 6.51,11.66 6.51,12.69 11.32,17.49 IC3.4 11.66,17.83 11.66,18.86 12.69,19.89 12.69,26.4 11.66,27.43 11.66,31.55 IC4.4 11.66,31.89 12.69,32.92 12.69,40.46 12,41.15 12,44.23 11.66,44.58 11.66,46.98 IC5.4 | 40.8,30.52 37.38,27.09 37.38,14.74 35.66,13.03 35.66,8.91 C21.1 | 40.8,30.52 53.49,30.52 54.52,29.49 IC7.8 | v37.38,33.6 40.46,30.52 40.8,30.52 | QG1.8 4.8,82.64 2.74,84.7 2.74,89.84 R26.2 2.74,90.18 12.69,90.18 R27.2 | R30.2 42.86,90.18 33.26,90.18 R25.2 32.92,90.18 22.97,90.18 R24.2 22.97,89.84 22.97,86.41 25.38,84.01 D3.A | v25.72,76.47 22.97,73.72 C20.1 | 64.12,89.15 62.41,90.87 62.41,93.95 SV5.1 62.06,94.3 v56.58,94.3 | 64.12,89.15 65.49,87.78 69.27,87.78 70.29,88.81 70.98,88.81 R9.2 | 94.64,83.67 94.98,83.67 96.36,85.04 IC9.7 | 94.64,83.67 87.44,83.67 86.41,82.64 85.38,82.64 C16.1 85.04,82.64 76.81,90.87 65.84,90.87 64.12,89.15 | 86.41,54.52 87.44,54.52 R1.2 87.78,54.52 90.87,54.52 92.58,52.81 92.58,43.55 93.95,42.18 SV6.2 | 86.41,54.52 65.49,54.52 64.81,55.21 60.35,55.21 57.26,52.12 IC1.30 | 86.41,54.52 86.41,59.66 | 86.41,59.66 86.41,60.01 85.38,61.04 85.38,62.06 C15.1 | 86.41,59.66 90.18,59.66 96.36,65.84 IC8.8 96.36,66.18 96.36,73.38 94.64,75.09 94.64,83.67
  Bottom 0.457: 68.58,5.83 66.52,5.83 64.81,4.12 C23.+ 62.75,5.83 55.89,5.83 53.15,8.57 51.09,8.57 C3.1 | 68.58,5.83 93.27,5.83 94.98,4.12 SV4.2 | 68.58,5.83 IC11.5 68.58,21.6 73.72,21.6 93.95,41.83 SV6.2 | IC3.4 11.66,17.49 14.06,15.09 21.95,15.09 22.97,14.06 27.77,14.06 C17.1 28.12,14.06 28.12,15.09 32.23,19.2 32.23,19.55 32.92,20.23 35.32,20.23 36.35,21.26 36.35,30.52 | 36.35,30.52 38.06,30.52 42.52,34.98 52.81,34.98 | 36.35,30.52 29.49,30.52 C18.1 | 52.81,34.98 54.52,36.69 IC1.10 | v37.38,33.6 35.66,35.32 35.66,37.72 33.95,39.43 33.95,43.89 30.52,47.32 30.52,51.09 28.12,53.49 28.12,54.52 C19.1 | 52.81,34.98 52.81,31.2 54.52,29.49 IC7.8 54.86,29.15 56.58,27.43 56.58,26.06 55.89,25.38 53.49,25.38 52.81,24.69 52.81,17.14 54.52,15.43 54.52,11.66 R3.2 | IC6.16 8.57,68.58 8.57,78.87 5.14,82.3 QG1.8 | R27.2 13.03,90.18 22.63,90.18 R24.2 | 27.43,78.18 v25.72,76.47 | 27.43,78.18 27.43,81.95 25.72,83.67 D3.A | 27.43,78.18 28.12,77.5 33.6,77.5 36.01,79.9 38.75,79.9 39.78,78.87 40.46,78.87 R21.2 | v56.58,94.3 53.15,94.3 49.03,90.18 43.2,90.18 R30.2
VO  (via drill 0.35)
  Top 0.457: VR4.2 55.55,97.73 53.49,95.67 53.49,92.93 VR4.1 53.49,92.58 54.86,91.21 v57.61,91.21
  Bottom 0.457: v57.61,91.21 61.72,91.21 64.47,93.95 SV5.3

## Text on the board
200bmp: C:/Users/Ivory/Desktop/idesa.bmp